# Altium PCB PCB1.PcbDoc
Units mm, origin at the board's own origin, x right, y up, seen from the top; angles counter-clockwise.
Board outline 76.3 x 50 mm, 2 copper layers (Top Layer, Bottom Layer); 29 components, 38 nets, 110 pads, 18 vias.
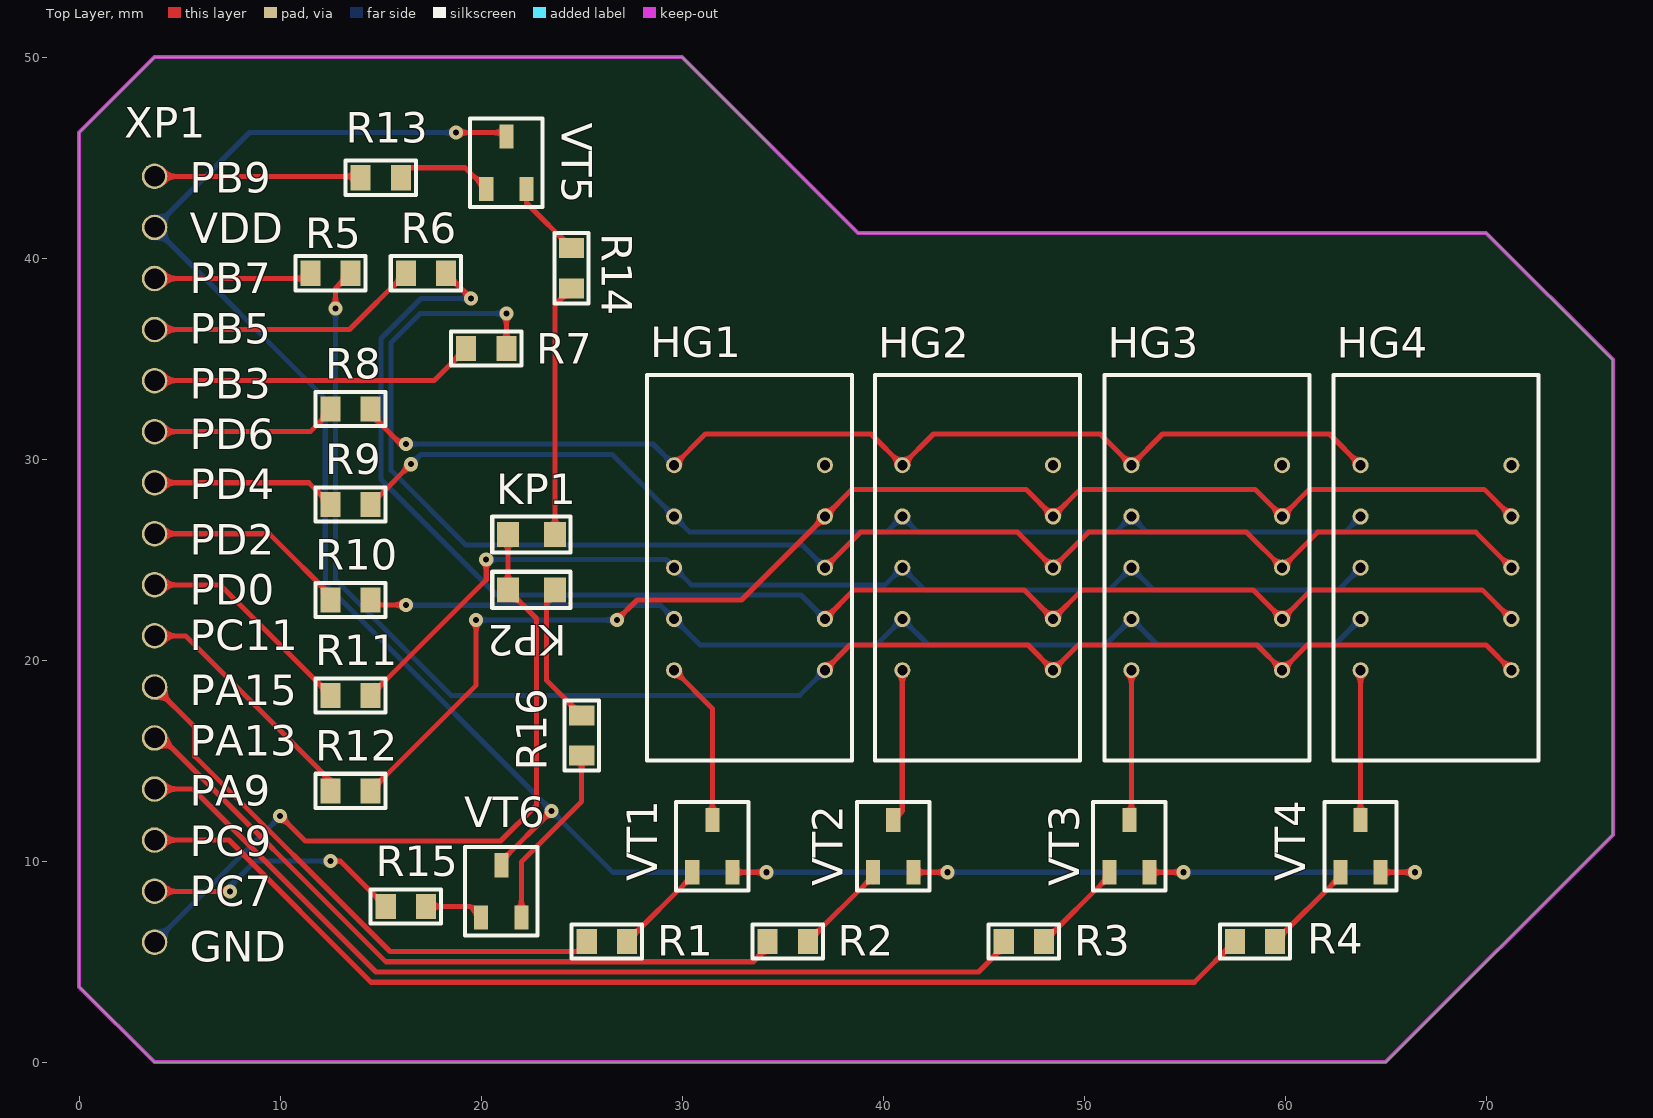
[diagram p0: Top Layer view]
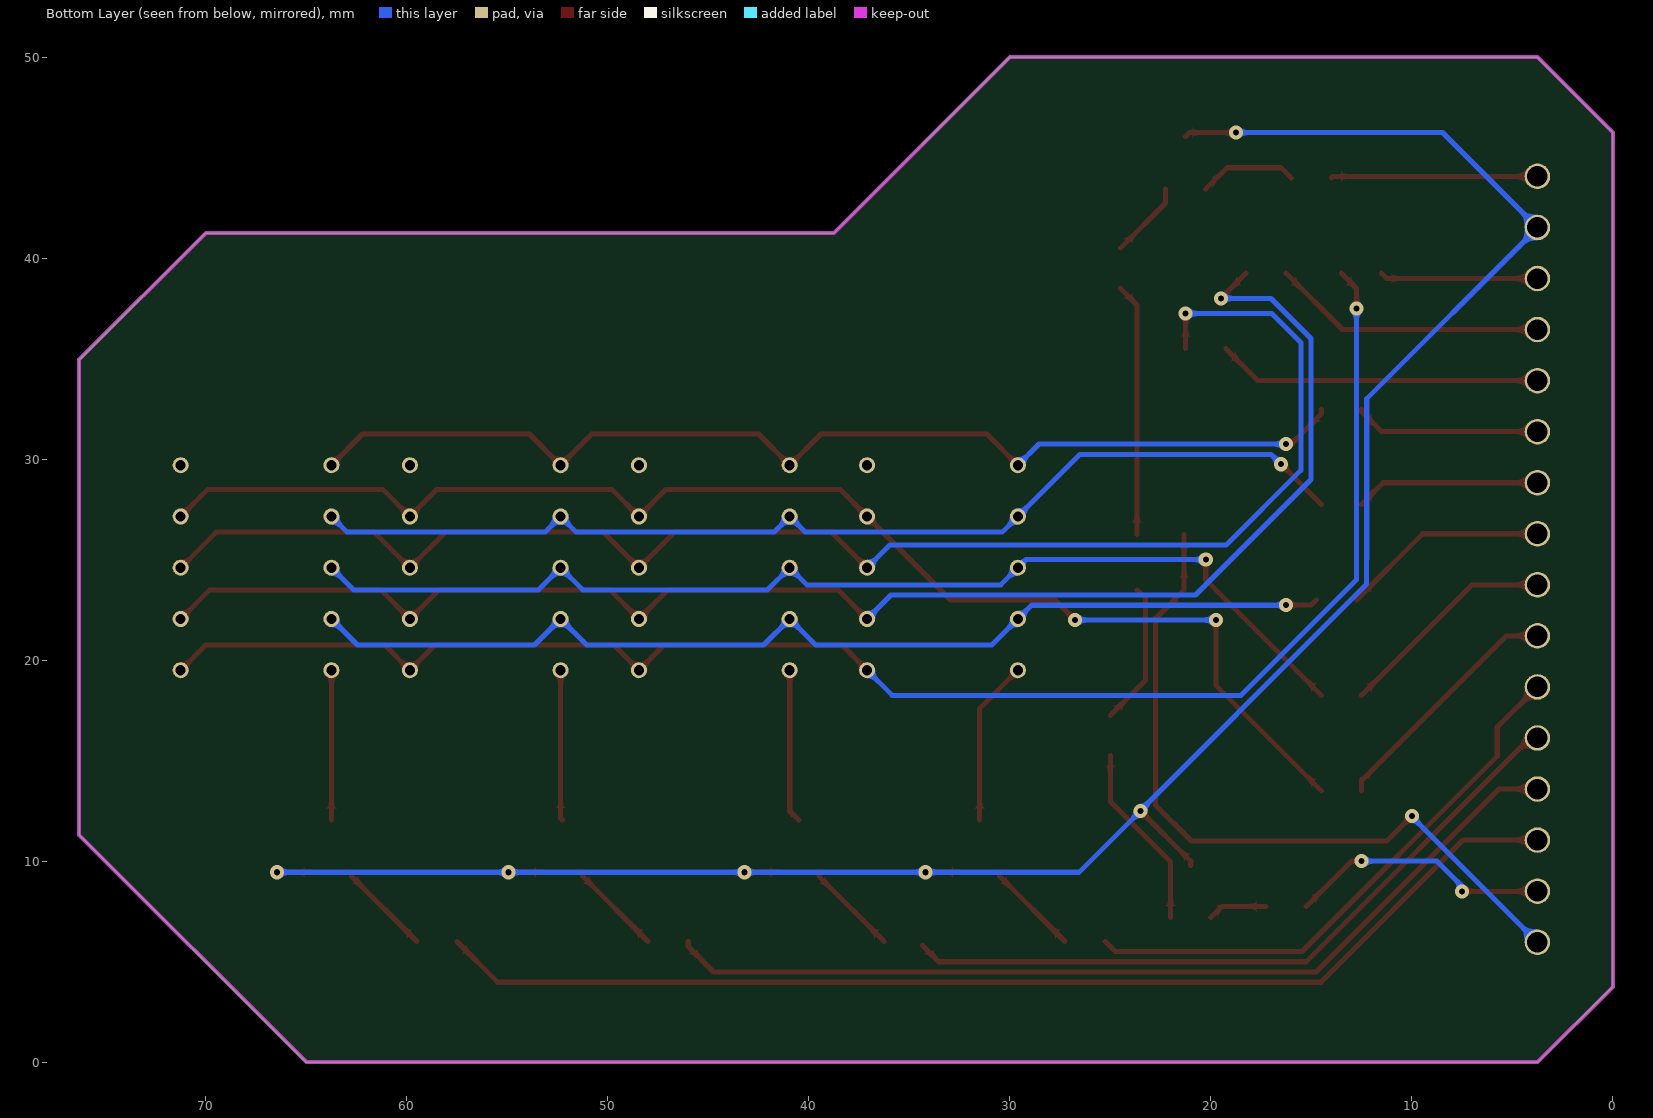
[diagram p1: Bottom Layer view, seen from below]
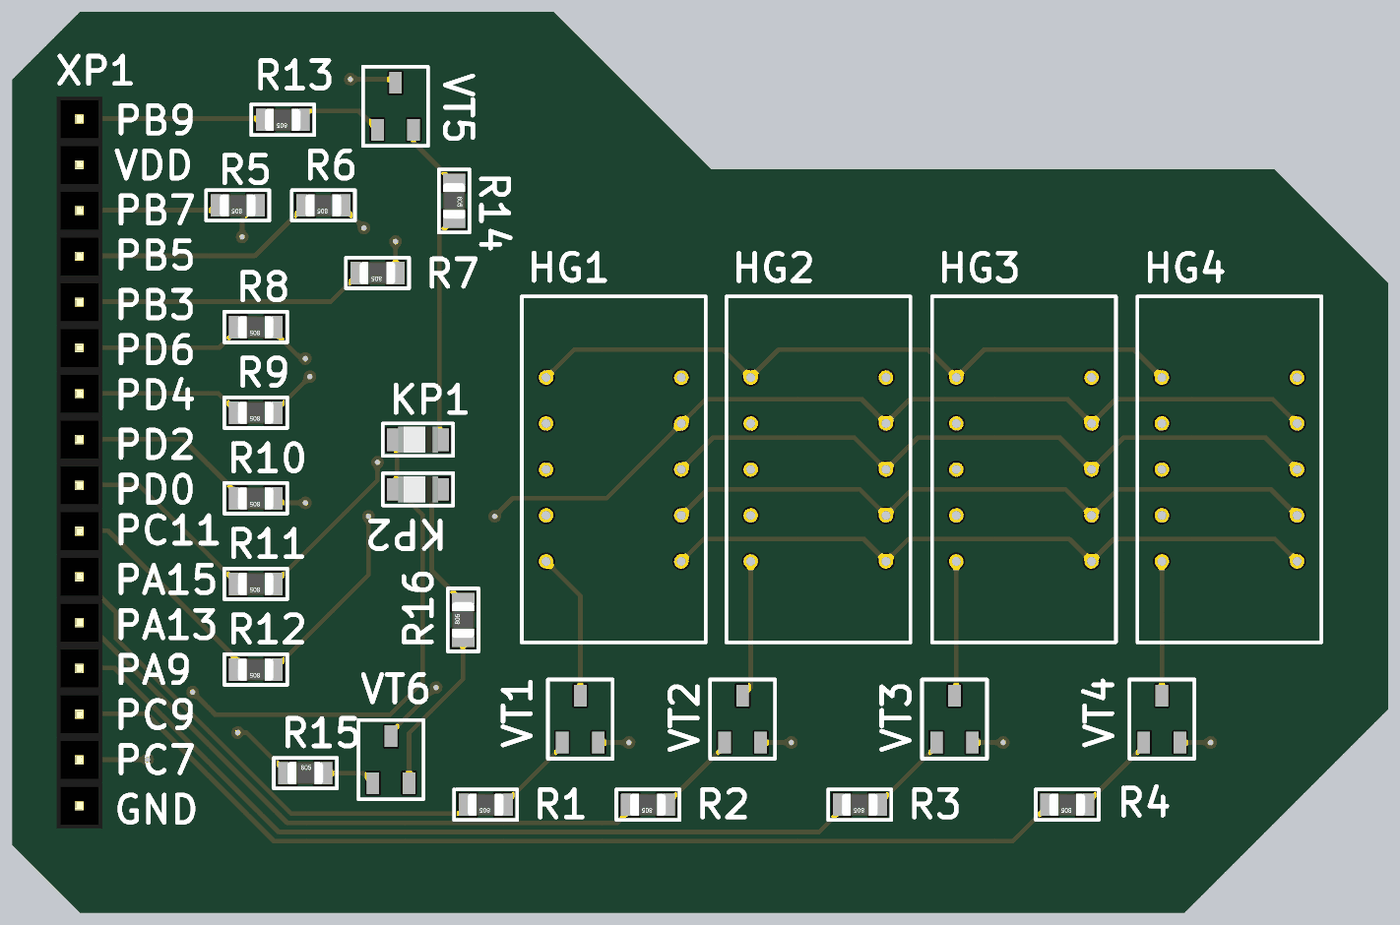
[diagram p2: 3D render of the assembled board from above, using the file's embedded part models]

## Layer stack, top to bottom
Top Solder: solder mask 0.0102, Solder Resist, Dk 3.5
Top Layer: signal copper 0.0356
Dielectric 1: dielectric 0.32, FR-4, Dk 4.8
Bottom Layer: signal copper 0.0356
Bottom Solder: solder mask 0.0102, Solder Resist, Dk 3.5

## Board outline
3.75,0 0,3.75 0,46.25 3.75,50 30,50 38.75,41.25 70,41.25 76.3,34.95 76.3,11.3 65,0

## Design rules (kind name [scope] priority, off if disabled: settings)
Clearance [All] p1: gap=0.254 ignorepadtopadclearanceinfootprint=FALSE except(0: Arc-Hole Track-Hole SMDPad-Hole THPad-Hole Via-Hole Fill-Hole Poly-Hole Region-Hole Text-Hole)
PolygonConnect [All] p1: connectstyle=Relief reliefconductorwidth=0.254 reliefentries=4 polygonreliefangle="90 Angle" airgapwidth=0.254
RoutingVias [All] p1: holewidth=0.711 width=1.27 viastyle="Through Hole" minholewidth=0.3 minwidth=0.7 maxholewidth=0.711 maxwidth=1.27
SolderMaskExpansion [All] p1: expansion=0.102
Width [All] p1: maxlimit=0.254 minlimit=0.254 preferedwidth=0.254
30 further rules are at their usual default settings.

## Components (designator, comment, footprint, x,y, rotation, side; value= is the part's Value field where it differs from the comment)
HG1 "SA04-12EWA" Led-7 33.35,24.6 r90 top
HG2 "SA04-12EWA" Led-7 44.7,24.6 r90 top
HG3 "SA04-12EWA" Led-7 56.1,24.6 r90 top
HG4 "SA04-12EWA" Led-7 67.5,24.6 r90 top
KP1 "light" "KP LD RED" 22.5,26.25 r180 top
KP2 "light" "KP LD RED" 22.5,23.5 r180 top
R1 "1k" "Res 0805" 26.25,6 r180 top
R2 "1k" "Res 0805" 35.25,6 r180 top
R3 "1k" "Res 0805" 47,6 r180 top
R4 "1k" "Res 0805" 58.5,6 r180 top
R5 "4.7k" "Res 0805" 12.5,39.25 r180 top
R6 "4.7k" "Res 0805" 17.25,39.25 r180 top
R7 "4.7k" "Res 0805" 20.25,35.5 r180 top
R8 "4.7k" "Res 0805" 13.5,32.5 r180 top
R9 "4.7k" "Res 0805" 13.5,27.75 r180 top
R10 "4.7k" "Res 0805" 13.5,23 r180 top
R11 "4.7k" "Res 0805" 13.5,18.25 r180 top
R12 "4.7k" "Res 0805" 13.5,13.5 r180 top
R13 "1k" "Res 0805" 15,44 r180 top
R14 "0.1k" "Res 0805" 24.5,39.5 r270 top
R15 "1k" "Res 0805" 16.25,7.75 r0 top
R16 "0.1k" "Res 0805" 25,16.25 r90 top
VT1 "bipolar_pnp" SOT-23 31.5,10.75 r0 top
VT2 "bipolar_pnp" SOT-23 40.5,10.75 r0 top
VT3 "bipolar_pnp" SOT-23 52.25,10.75 r0 top
VT4 "bipolar_pnp" SOT-23 63.75,10.75 r0 top
VT5 "bipolar_pnp" SOT-23 21.25,44.75 r0 top
VT6 "bipolar_pnp" SOT-23 21,8.5 r0 top
XP1 "PBD 1x16" "PBD - 1x16" 3.75,26.29 r270 top

## Footprints (in the part's own frame and the unit in brackets; to place one, negate y for a bottom-side part, rotate by r counter-clockwise, add the part's x,y. Pads: shape width x height; smd on the part's side, far side on the other; paste and mask are expansions set on the pad)
"KP LD RED" [mm]
  rect 1.1x1.25 smd: 1(-1.175,0) 2(1.175,0)
  silkscreen extent -1.95,-0.9 1.95,0.9, body extent -1.1,-0.72 1.1,0.72, height 0.95
Led-7 [mm]
  round 0.8 hole 0.5: 1(-5.1,3.75) 2(-2.55,3.75) 3(0,3.75) 4(2.55,3.75) 5(5.1,3.75) 6(5.1,-3.75) 7(2.55,-3.75) 8(0,-3.75) 9(-2.55,-3.75) 10(-5.1,-3.75)
  silkscreen extent -9.6,-5.1 9.6,5.1, body extent -9.38,-4.87 9.38,4.9, height 7.26
"PBD - 1x16" [mm]
  round 1.27 hole 1.02: 1(-17.78,0) 2(-15.24,0) 3(-12.7,0) 4(-10.16,0) 5(-7.62,0) 6(-5.08,0) 7(-2.54,0) 8(0,0) 9(2.54,0) 10(5.08,0) 11(7.62,0) 12(10.16,0) 13(12.7,0) 14(15.24,0) 15(17.78,0) 16(20.32,0)
  body extent -19.02,-1.3 21.62,1.24, height 8.77
"Res 0805" [mm]
  rect 1x1.25 smd: 1(-1,0) 2(1,0)
  silkscreen extent -1.75,-0.85 1.75,0.85, body extent -1,-0.62 1,0.63, height 0.78
SOT-23 [mm]
  rect 0.7x1.2 smd: 1(-1,-1.3) 2(1,-1.3) 3(0,1.3)
  silkscreen extent -1.8,-2.2 1.8,2.2, body extent -1.5,-0.7 1.5,0.7, height 1

## Part data
HG1 HG2 HG3 HG4: library part Led-7
R1 R2 R3 R4 R5 R6 R7 R8 R9 R10 R11 R12 R13 R14 R15 R16: library part Resistor

## Via types
v1: diameter 0.7, hole 0.3, Top Layer to Bottom Layer, tented both sides, 18 vias

## Nets (pads, with @x,y where several pads share a name; then routed paths per layer and width w, separated by ;. In a path a pad name is that pad's centre, name@x,y a point inside that pad or via, vN(x,y) a via of type N, cw(c..) or ccw(c..) an arc to the next point about the centre after c; other vN are vias at no path point)
a: R5.2 XP1.3 | length 7.9
  Top Layer w0.254: XP1.3 11.24,38.99 R5.2
b: R6.2 XP1.4 | length 13.7
  Top Layer w0.254: XP1.4 13.45,36.45 R6.2
c: R7.2 XP1.5 | length 16.2
  Top Layer w0.254: XP1.5 17.66,33.91 R7.2
d: R8.2 XP1.6 | length 9.3
  Top Layer w0.254: XP1.6 11.5,31.37 12.5,32.37 R8.2
dp: R12.2 XP1.10 | length 12.2
  Top Layer w0.254: XP1.10 5.29,21.21 12.5,14 R12.2
e: R9.2 XP1.7 | length 9.2
  Top Layer w0.254: XP1.7 11.42,28.83 R9.2
f: R10.2 XP1.8 | length 10.4
  Top Layer w0.254: XP1.8 9.46,26.29 R10.2@12.75,23
g: R11.2 XP1.9 | length 11
  Top Layer w0.254: XP1.9 7,23.75 R11.2
GND: KP1.2 KP2.2 XP1.16 | length 37
  Top Layer w0.254: v1(10,12.25) 11.25,11 20.966,11 22.75,12.784 22.75,22.075 KP2.2 KP1.2
  Bottom Layer w0.254: XP1.16 10.03,12.25 v1(10,12.25)
Ld1: R13.2 XP1.1 | length 10.3
  Top Layer w0.254: XP1.1 13.93,44.07 R13.2
Ld2: R15.1 XP1.15 | length 13.2
  Top Layer w0.254: XP1.15 3.76,8.5 v1(7.5,8.5) ; v1(12.5,10) 13,10 R15.1
  Bottom Layer w0.254: v1(7.5,8.5) 7.5,8.75 8.75,10 v1(12.5,10)
NetHG1_1: HG1.1 VT1.3 | length 8.2
  Top Layer w0.254: HG1.1 31.5,17.6 VT1.3
NetHG1_2: HG1.2 HG2.2 HG3.2 HG4.2 R10.1 | length 52.6
  Top Layer w0.254: R10.1@14.75,23 15,22.75 v1(16.25,22.75)
  Bottom Layer w0.254: v1(16.25,22.75) 16.266,22.734 28.916,22.734 HG1.2 30.9,20.75 39.65,20.75 HG2.2 42.25,20.75 51.05,20.75 HG3.2 53.65,20.75 62.45,20.75 HG4.2
NetHG1_3: HG1.3 HG2.3 HG3.3 HG4.3 R11.1 | length 55.3
  Top Layer w0.254: R11.1 20.25,24 v1(20.25,25)
  Bottom Layer w0.254: v1(20.25,25) 29.2,25 HG1.3 30.45,23.75 40.1,23.75 HG2.3 42.05,23.5 51.25,23.5 HG3.3 53.45,23.5 62.65,23.5 HG4.3
NetHG1_4: HG1.4 HG2.4 HG3.4 HG4.4 R9.1 | length 53.5
  Top Layer w0.254: R9.1 15,28.25 v1(16.5,29.75)
  Bottom Layer w0.254: v1(16.5,29.75) 16.508,29.75 17,30.242 26.508,30.242 HG1.4 30.381,26.369 40.169,26.369 HG2.4 41.731,26.369 51.569,26.369 HG3.4 53.131,26.369 62.969,26.369 HG4.4
NetHG1_5: HG1.5 HG2.5 HG3.5 HG4.5 R8.1 | length 54.4
  Top Layer w0.254: R8.1 14.5,32.25 16,30.75 v1(16.25,30.75) ; HG1.5 31.15,31.25 39.4,31.25 HG2.5 42.5,31.25 50.8,31.25 HG3.5 53.9,31.25 62.2,31.25 HG4.5
  Bottom Layer w0.254: v1(16.25,30.75) 28.55,30.75 HG1.5
NetHG1_7: HG1.7 HG2.7 HG3.7 HG4.7 R12.1 | length 67.7
  Top Layer w0.254: R12.1 19.75,18.75 v1(19.75,22) ; v1(26.75,22) 27.75,23 31.312,23 32.95,23 HG1.7 38.45,28.5 47.1,28.5 HG2.7 49.8,28.5 58.5,28.5 HG3.7 61.2,28.5 69.9,28.5 HG4.7
  Bottom Layer w0.254: v1(19.75,22) v1(26.75,22)
NetHG1_8: HG1.8 HG2.8 HG3.8 HG4.8 R7.1 | length 76.6
  Top Layer w0.254: R7.1 v1(21.25,37.25) ; HG1.8 38.869,26.369 46.681,26.369 HG2.8 50.219,26.369 58.081,26.369 HG3.8 61.619,26.369 69.481,26.369 HG4.8
  Bottom Layer w0.254: v1(21.25,37.25) 16.968,37.25 15.519,35.801 15.519,29.447 19.235,25.731 35.969,25.731 HG1.8
NetHG1_9: HG1.9 HG2.9 HG3.9 HG4.9 R6.1 | length 76.8
  Top Layer w0.254: R6.1 v1(19.5,38) ; HG1.9 38.55,23.5 47,23.5 HG2.9 49.9,23.5 58.4,23.5 HG3.9 61.3,23.5 69.8,23.5 HG4.9
  Bottom Layer w0.254: v1(19.5,38) 17,38 15.011,36.011 15.011,28.989 20.758,23.242 35.908,23.242 HG1.9
NetHG1_10: HG1.10 HG2.10 HG3.10 HG4.10 R5.1 | length 80.1
  Top Layer w0.254: v1(12.75,37.5) 12.75,38.5 R5.1 ; HG1.10 38.35,20.75 47.2,20.75 HG2.10 49.7,20.75 58.6,20.75 HG3.10 61.1,20.75 70,20.75 HG4.10
  Bottom Layer w0.254: v1@12.758,37.5 12.758,23.992 18.5,18.25 35.85,18.25 HG1.10
NetHG2_1: HG2.1 VT2.3 | length 7.6
  Top Layer w0.254: VT2.3 40.95,12.5 HG2.1
NetHG3_1: HG3.1 VT3.3 | length 7.5
  Top Layer w0.254: VT3.3 52.35,12.15 HG3.1
NetHG4_1: HG4.1 VT4.3 | length 7.5
  Top Layer w0.254: VT4.3 HG4.1
NetKP1_1: KP1.1 R14.2 | length 12.6
  Top Layer w0.254: KP1.1 23.675,37.675 R14.2
NetKP2_1: KP2.1 R16.2 | length 7.1
  Top Layer w0.254: KP2.1 23.258,23.083 23.258,18.992 R16.2
NetR1_1: R1.1 VT1.1 | length 4.8
  Top Layer w0.254: R1.1 30.5,9.25 VT1.1
NetR2_1: R2.1 VT2.1 | length 4.8
  Top Layer w0.254: R2.1 39.5,9.25 VT2.1
NetR3_1: R3.1 VT3.1 | length 4.8
  Top Layer w0.254: R3.1 51.25,9.25 VT3.1
NetR4_1: R4.1 VT4.1 | length 4.8
  Top Layer w0.254: R4.1 62.75,9.25 VT4.1
NetR13_1: R13.1 VT5.1 | length 4.9
  Top Layer w0.254: R13.1 16.5,44.5 19.2,44.5 VT5.1
NetR14_1: R14.1 VT5.2 | length 3.9
  Top Layer w0.254: VT5.2 22.25,42.75 R14.1
NetR15_2: R15.2 VT6.1 | length 3
  Top Layer w0.254: R15.2 19.45,7.75 VT6.1
NetR16_1: R16.1 VT6.2 | length 9.3
  Top Layer w0.254: VT6.2 22,9.966 25,12.966 R16.1
OA1: R1.2 XP1.11 | length 28
  Top Layer w0.254: XP1.11 5.75,16.67 5.75,15.218 15.466,5.502 24.752,5.502 R1.2
OA2: R2.2 XP1.12 | length 35.5
  Top Layer w0.254: XP1.12 4.12,16.13 15.256,4.994 33.544,4.994 R2.2@34.35,5.8
OA3: R3.2 XP1.13 | length 46.8
  Top Layer w0.254: XP1.13 5.66,13.59 14.764,4.486 44.736,4.486 46,5.75 R3.2
OA4: R4.2 XP1.14 | length 57.5
  Top Layer w0.254: XP1.14 7.45,11.05 14.522,3.978 55.478,3.978 R4.2
VDD: VT1.2 VT2.2 VT3.2 VT4.2 VT5.3 VT6.3 XP1.2 | length 118.5
  Top Layer w0.254: v1(18.75,46.25) 21.05,46.25 VT5.3 ; VT6.3 21,10 v1(23.5,12.5) ; VT1.2 v1(34.2,9.45) ; VT2.2 v1(43.2,9.45) ; VT3.2 v1(54.95,9.45) ; VT4.2 v1(66.45,9.45)
  Bottom Layer w0.254: XP1.2@3.625,41.625 XP1.2@3.845,41.625 ; 18.734,17.266 19.7,16.3 ; v1(18.75,46.25) 8.47,46.25 XP1.2@3.845,41.625 ; v1(23.5,12.5) 23.5,12.532 19.732,16.3 ; v1(66.45,9.45) v1(54.95,9.45) v1(43.2,9.45) v1(34.2,9.45) 26.55,9.45 19.7,16.3 ; XP1.2@3.845,41.625 XP1.2 3.75,41.5 12.242,33.008 12.242,25.04 12.25,25.032 12.25,23.782 19.732,16.3 ; 19.7,16.3 19.732,16.3
pads on no net: HG1.6 HG2.6 HG3.6 HG4.6

## Keep-outs
Keep-Out Layer:
  the board outline again, w0.2

## Silkscreen, mask and mechanical layers (free items; w line width, h text height)
Top Overlay:
  text "PB9" at 5.5,43.25 h1.52
  text "VDD" at 5.5,40.75 h1.52
  text "PB7" at 5.5,38.25 h1.52
  text "PB5" at 5.5,35.75 h1.52
  text "PB3" at 5.5,33 h1.52
  text "PD6" at 5.5,30.5 h1.52
  text "PD4" at 5.5,28 h1.52
  text "PD2" at 5.5,25.25 h1.52
  text "PD0" at 5.5,22.75 h1.52
  text "PC11" at 5.5,20.5 h1.52
  text "PA15" at 5.5,17.75 h1.52
  text "PA13" at 5.5,15.25 h1.52
  text "PA9" at 5.5,12.75 h1.52
  text "PC9" at 5.5,10.25 h1.52
  text "PC7" at 5.5,7.75 h1.52
  text "GND" at 5.5,5 h1.52